# Altium PCB SolarPanel7Cells.PcbDoc
Units mm, origin at the board's own origin, x right, y up, seen from the top; angles counter-clockwise.
Board outline 325 x 75 mm, 2 copper layers (Top Layer, Bottom Layer); 13 components, 12 nets, 35 pads, 10 vias.
Unrouted connection lines stored in the file: 7.
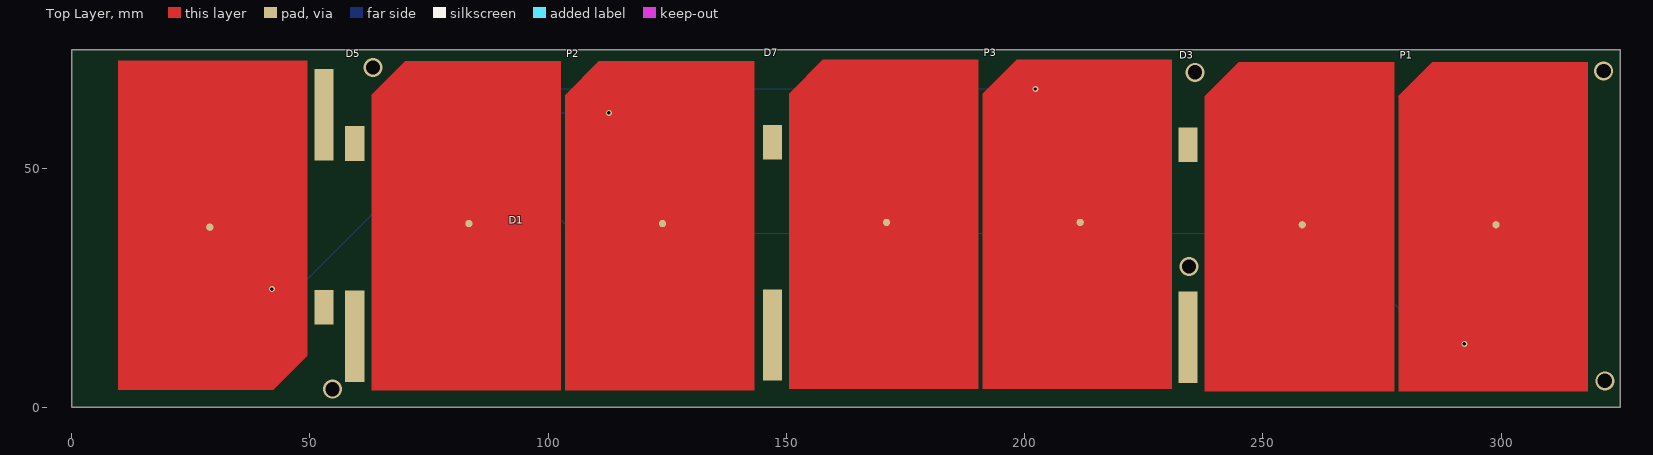
[diagram p0: Top Layer view]
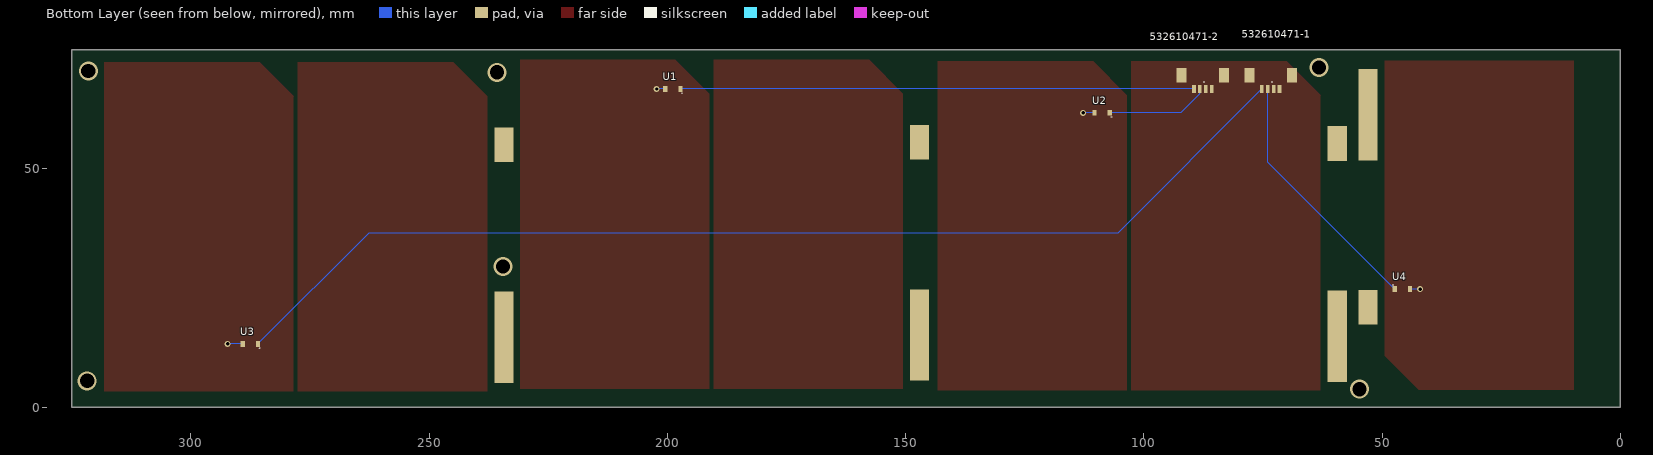
[diagram p1: Bottom Layer view, seen from below]

## Layer stack, top to bottom
Top Solder: solder mask 0.0102, Solder Resist, Dk 3.5
Top Layer: signal copper 0.0356
Dielectric 1: dielectric 0.32, FR-4, Dk 4.8
Bottom Layer: signal copper 0.0356
Bottom Solder: solder mask 0.0102, Solder Resist, Dk 3.5

## Board outline
0,0 0,75 325,75 325,0

## Design rules (kind name [scope] priority, off if disabled: settings)
Clearance [All] p1: gap=0.254 ignorepadtopadclearanceinfootprint=FALSE except(0: Arc-Hole Track-Hole SMDPad-Hole THPad-Hole Via-Hole Fill-Hole Poly-Hole Region-Hole Text-Hole)
PolygonConnect [All] p1: connectstyle=Relief reliefconductorwidth=0.254 reliefentries=4 polygonreliefangle="90 Angle" airgapwidth=0.254
RoutingVias [All] p1: holewidth=0.711 width=1.27 viastyle="Through Hole" minholewidth=0.711 minwidth=1.27 maxholewidth=0.711 maxwidth=1.27
SolderMaskExpansion [All] p1: expansion=0.102
Width [All] p1: maxlimit=0.254 minlimit=0.254 preferedwidth=0.254
30 further rules are at their usual default settings.

## Components (designator, comment, footprint, x,y, rotation, side; value= is the part's Value field where it differs from the comment)
532610471-1 "Connector 4POS Molex PicoBlade" 532610471 75.25,66.75 r270 bottom
532610471-2 "Connector 4POS Molex PicoBlade" 532610471 89.5,66.75 r270 bottom
D1 "Solar Cell" SolAeroBJT 49.388,72.725 r270 top
D3 "Solar Cell" SolAeroBJT 237.862,3.275 r90 top
D5 "Solar Cell" SolAeroBJT 62.974,3.525 r90 top
D7 "Solar Cell" SolAeroBJT 150.612,3.775 r90 top
P1 "Solar Cell" SolAeroBJTPositive 278.5,3.275 r90 top
P2 "Solar Cell" SolAeroBJTPositive 103.612,3.525 r90 top
P3 "Solar Cell" SolAeroBJTPositive 191.25,3.775 r90 top
U1 "MBR0520LT1G" SOD-123 198.85,66.75 r0 bottom value=Value
U2 "MBR0520LT1G" SOD-123 108.75,61.75 r0 bottom value=Value
U3 "MBR0520LT1G" SOD-123 287.5,13.25 r0 bottom value=Value
U4 "MBR0520LT1G" SOD-123 45.75,24.75 r180 bottom value=Value

## Footprints (in the part's own frame and the unit in brackets; to place one, negate y for a bottom-side part, rotate by r counter-clockwise, add the part's x,y. Pads: shape width x height; smd on the part's side, far side on the other; paste and mask are expansions set on the pad)
532610471 [mm] "Connector 4POS Molex PicoBlade"
  rect 1.6x0.8 smd: 1(0,3.75) 2(0,2.5) 3(0,1.25) 4(0,0)
  rect 3x2.1 smd: ""(-2.9,-2.55) ""(-2.9,6.3)
  silkscreen extent -1.52,2.07 -1.42,2.17, body extent -4.71,-3.81 1.02,7.56, height 0.6
SOD-123 [mm] "SODFL, 2-Leads, Body 1.60x3.75mm, IPC Medium Density"
  rect 0.9x1.2 smd: 1(-1.6,0) 2(1.6,0)
  silkscreen extent -2,0.85 -1.9,0.95, body extent -1.4,-0.9 1.4,0.9, height 1.35
SolAeroBJT [mm] "Solar Cell"
  round 1.524 smd: 1(34.975,-20.388)
  rect 19.16x4 all layers, no hole: 2(11.36,3.57)
  rect 7.26x4 all layers, no hole: 2(51.78,3.57)
  Top Layer region: 69.066,-7.058 69.066,-7.053 61.956,0.057 61.942,0.043 0.043,0.043 0.043,-39.639 69.066,-39.639
SolAeroBJTPositive [mil] "Solar Cell"
  round 60 smd: 1(1376.95,-802.68)
  Top Layer region: 2719.13,-277.86 2719.13,-277.68 2439.2,2.25 2438.66,1.71 1.71,1.71 1.71,-1560.57 2719.15,-1560.57

## Part data
532610471-1: library part 532610471, "GomSpace Px 4POS Molex PicoBlade"
532610471-2: library part 532610471
D1 D3 D5 D7: library part SolAeroBJTSpaceSolarCell, "SolAero BJT Space Solar Cell"
P1 P2 P3: library part SolAeroBJT_2, "SolAero BJT Space Solar Cell"
U1 U2 U3 U4: "Imported", C="Copyright (C) 2015 Accelerated Designs. All rights reserved", Copyright="Copyright (C) 2015 Accelerated Designs. All rights reserved", Manufacturer_Part_Number=MBR0520LT1G, RefDes=RefDes, Type=Type, Vendor="ON Semiconductor"

## Via types
v1: diameter 4, hole 3, Top Layer to Bottom Layer, 6 vias
v2: diameter 1.27, hole 0.711, Top Layer to Bottom Layer, 4 vias

## Nets (pads, with @x,y where several pads share a name; then routed paths per layer and width w, separated by ;. In a path a pad name is that pad's centre, name@x,y a point inside that pad or via, vN(x,y) a via of type N, cw(c..) or ccw(c..) an arc to the next point about the centre after c; other vN are vias at no path point)
"C1 PV": D1.1 U4.2 | length 2.1
  Bottom Layer w0.254: v2(42,24.75) U4.2
"C1 VSC": 532610471-1.3 U4.1 | length 53
  Bottom Layer w0.254: U4.1 74,51.4 532610471-1.3
GND: 532610471-1.1 532610471-1.2 532610471-2.1 532610471-2.2 D1.2 D3.2 D5.2 D7.2
NetD3_1: D3.1
NetD5_1: D5.1
NetD7_1: D7.1
"P1 PV": P3.1 U1.2 | length 1.8
  Bottom Layer w0.254: U1.2 v2(202.25,66.75)
"P1 VSC": 532610471-2.4 U1.1 | length 107.8
  Bottom Layer w0.254: 532610471-2.4 U1.1
"P2 PV": P2.1 U2.2 | length 2.4
  Bottom Layer w0.254: U2.2 v2(112.75,61.75)
"P2 VSC": 532610471-2.3 U2.1 | length 21.6
  Bottom Layer w0.254: 532610471-2.3 88.25,65.75 92.25,61.75 U2.1
"P3 PV": P1.1 U3.2 | length 3.1
  Bottom Layer w0.254: U3.2 v2(292.25,13.25)
"P3 VSC": 532610471-1.4 U3.1 | length 232.8
  Bottom Layer w0.254: 532610471-1.4 105.5,36.5 262.65,36.5 U3.1
pads on no net: 532610471-1. 532610471-2.
copper on no net:
  other v1: 54.75,3.75 321.75,5.5 234.5,29.5 235.75,70.25 321.5,70.5 63.25,71.25

## Silkscreen, mask and mechanical layers (free items; w line width, h text height)
Mechanical 1:
  the board outline again, w0.254